# Altium PCB MB_ANALOG.PcbDoc
Units mm, origin at the board's own origin, x right, y up, seen from the top; angles counter-clockwise.
Board outline 130 x 70 mm, 2 copper layers (Top Layer, Bottom Layer); 63 components, 37 nets, 189 pads, 0 vias.
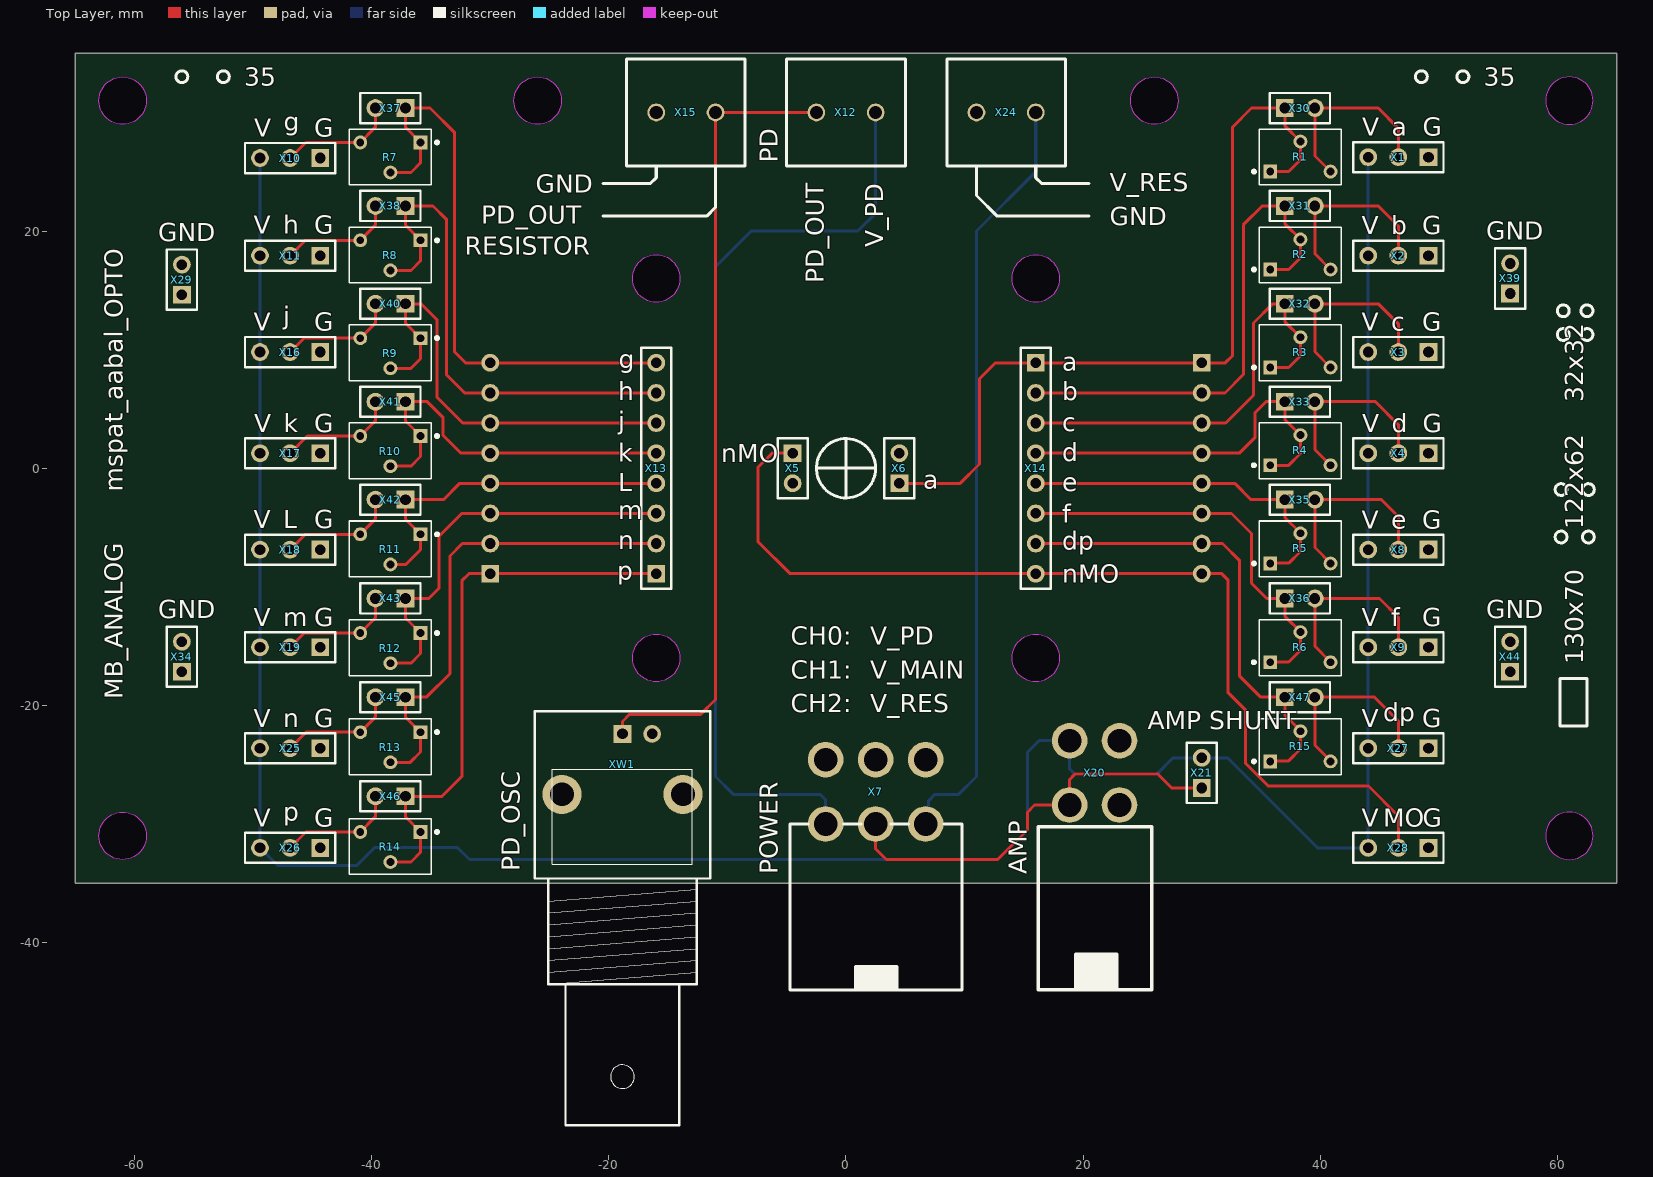
[diagram p0: Top Layer view]
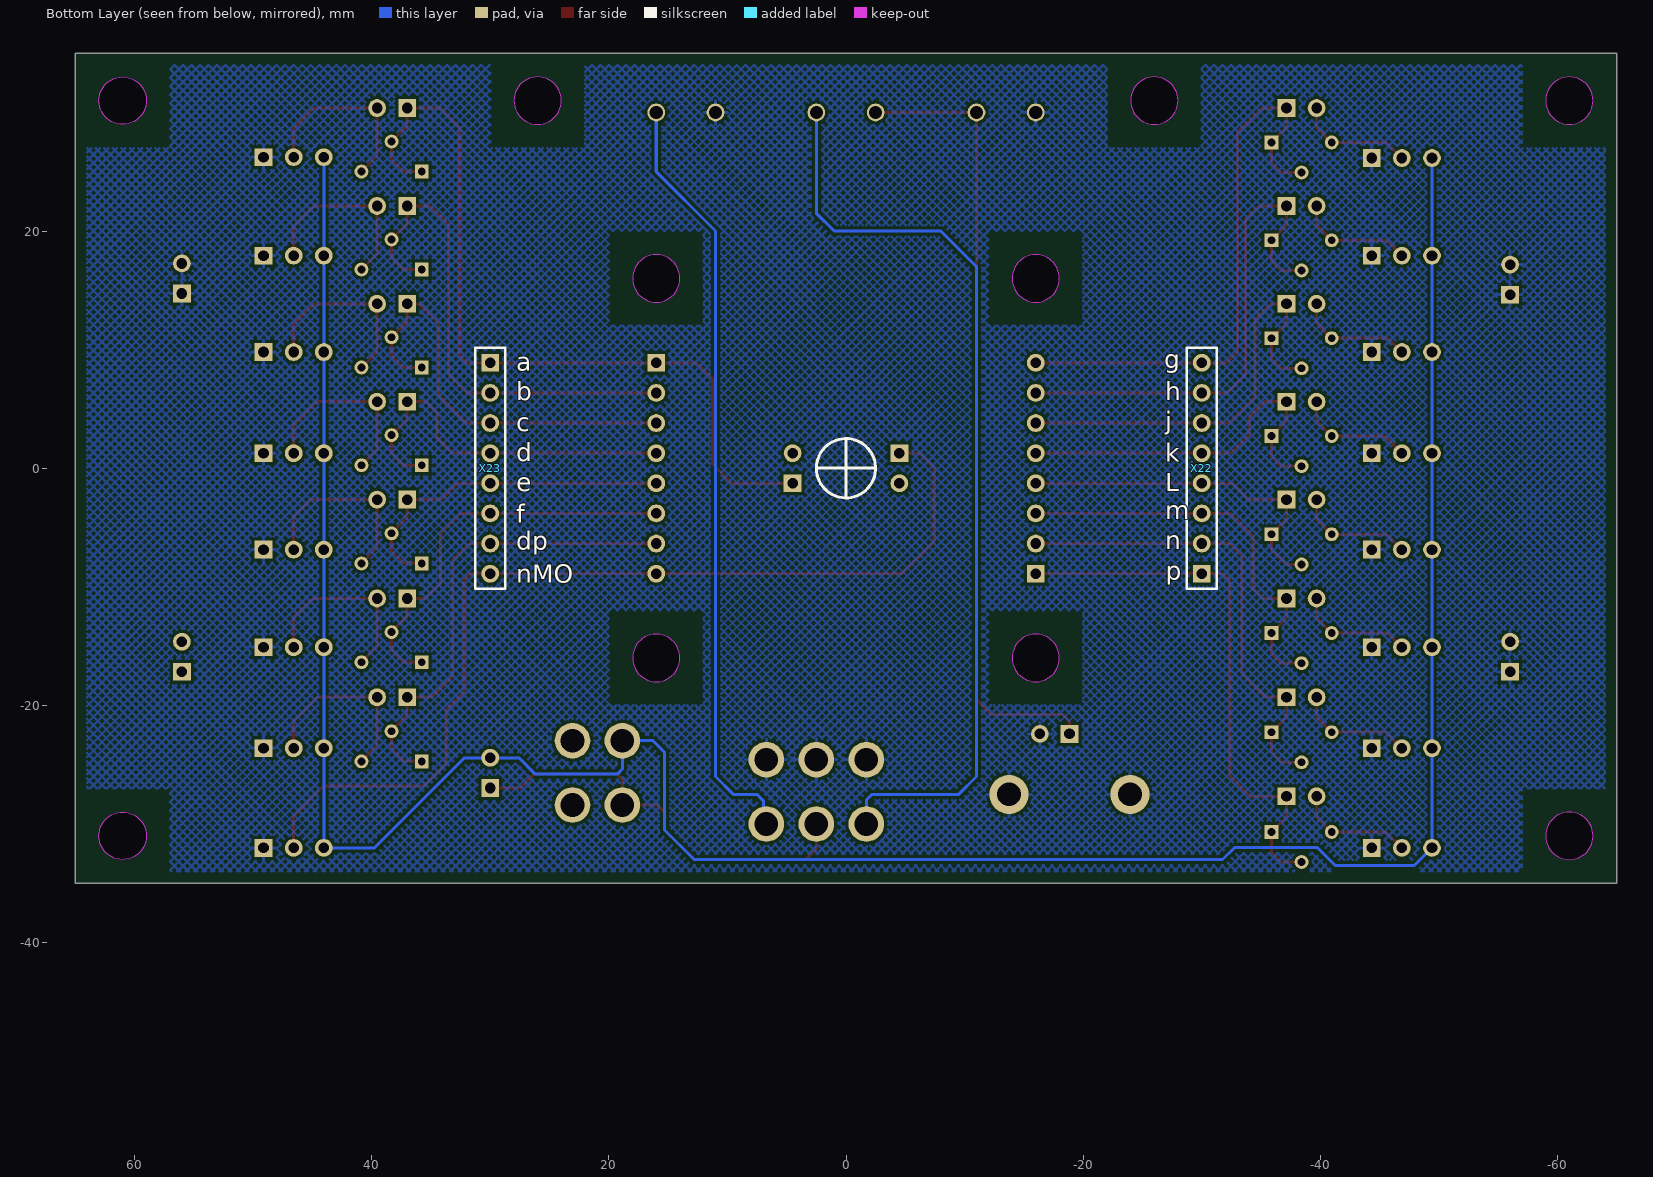
[diagram p1: Bottom Layer view, seen from below]

## Layer stack, top to bottom
Top Solder: solder mask 0.0102, Solder Resist, Dk 3.5
Top Layer: signal copper 0.0356
Dielectric 1: dielectric 0.32, FR-4, Dk 4.8
Bottom Layer: signal copper 0.0356
Bottom Solder: solder mask 0.0102, Solder Resist, Dk 3.5

## Board outline
-65,-35 65,-35 65,35 -65,35
cut-out: -16,-18 cw(c-16,-16) -18,-16 cw(c-16,-16) -16,-14 cw(c-16,-16) -14,-16 cw(c-16,-16)
cut-out: 26,29 cw(c26,31) 24,31 cw(c26,31) 26,33 cw(c26,31) 28,31 cw(c26,31)
cut-out: -16,14 cw(c-16,16) -18,16 cw(c-16,16) -16,18 cw(c-16,16) -14,16 cw(c-16,16)
cut-out: 16,-18 cw(c16,-16) 14,-16 cw(c16,-16) 16,-14 cw(c16,-16) 18,-16 cw(c16,-16)
cut-out: 16,14 cw(c16,16) 14,16 cw(c16,16) 16,18 cw(c16,16) 18,16 cw(c16,16)
cut-out: -26,29 cw(c-26,31) -28,31 cw(c-26,31) -26,33 cw(c-26,31) -24,31 cw(c-26,31)
cut-out: -61,29 cw(c-61,31) -63,31 cw(c-61,31) -61,33 cw(c-61,31) -59,31 cw(c-61,31)
cut-out: 59,31 ccw(c61,31) 61,29 ccw(c61,31) 63,31 ccw(c61,31) 61,33 ccw(c61,31)
cut-out: 59,-31 ccw(c61,-31) 61,-33 ccw(c61,-31) 63,-31 ccw(c61,-31) 61,-29 ccw(c61,-31)
cut-out: -61,-33 cw(c-61,-31) -63,-31 cw(c-61,-31) -61,-29 cw(c-61,-31) -59,-31 cw(c-61,-31)

## Design rules (kind name [scope] priority, off if disabled: settings)
Clearance [All] p1: gap=0.254 ignorepadtopadclearanceinfootprint=FALSE except(0: Arc-Hole Track-Hole SMDPad-Hole THPad-Hole Via-Hole Fill-Hole Poly-Hole Region-Hole Text-Hole)
PolygonConnect [All] p1: connectstyle=Relief reliefconductorwidth=0.254 reliefentries=4 polygonreliefangle="90 Angle" airgapwidth=0.254
RoutingVias [All] p1: holewidth=0.711 width=1.27 viastyle="Through Hole" minholewidth=0.711 minwidth=1.27 maxholewidth=0.711 maxwidth=1.27
SolderMaskExpansion [All] p1: expansion=0.102 istentingtop=FALSE
Width [All] p1: maxlimit=0.254 minlimit=0.254 preferedwidth=0.254
30 further rules are at their usual default settings.

## Classes and differential pairs
component class MB_ANALOG: R1 R2 R3 R4 R5 R6 R7 R8 R9 R10 R11 R12 R13 R14 R15 X1 X2 X3 X4 X5 X6 X7 X8 X9 X10 X11 X13 X18 X23 X25 X27 X34 X37 X46 X47 XW1

## Components (designator, comment, footprint, x,y, rotation, side; value= is the part's Value field where it differs from the comment)
R1 "RES 3266W" "RES 3266W" 35.779,25.011 r0 top
R2 "RES 3266W" "RES 3266W" 35.779,16.756 r0 top
R3 "RES 3266W" "RES 3266W" 35.779,8.501 r0 top
R4 "RES 3266W" "RES 3266W" 35.779,0.25 r0 top
R5 "RES 3266W" "RES 3266W" 35.779,-8.03 r0 top
R6 "RES 3266W" "RES 3266W" 35.779,-16.361 r0 top
R7 "RES 3266W" "RES 3266W" -35.875,27.475 r180 top
R8 "RES 3266W" "RES 3266W" -35.875,19.22 r180 top
R9 "RES 3266W" "RES 3266W" -35.875,10.965 r180 top
R10 "RES 3266W" "RES 3266W" -35.875,2.71 r180 top
R11 "RES 3266W" "RES 3266W" -35.875,-5.57 r180 top
R12 "RES 3266W" "RES 3266W" -35.875,-13.901 r180 top
R13 "RES 3266W" "RES 3266W" -35.875,-22.258 r180 top
R14 "RES 3266W" "RES 3266W" -35.875,-30.665 r180 top
R15 "RES 3266W" "RES 3266W" 35.779,-24.718 r0 top
X1 "Header 3" HDR1X3 49.114,26.231 r180 top
X2 "Header 3" HDR1X3 49.114,17.925 r180 top
X3 "Header 3" HDR1X3 49.114,9.797 r180 top
X4 "Header 3" HDR1X3 49.114,1.262 r180 top
X5 "Header 2" HDR1X2 -4.5,1.27 r270 top
X6 "Header 2" HDR1X2 4.5,-1.27 r90 top
X7 "POWER" POWER -1.717,-30 r180 top
X8 "Header 3" HDR1X3 49.114,-6.866 r180 top
X9 "Header 3" HDR1X3 49.114,-15.095 r180 top
X10 "Header 3" HDR1X3 -44.333,26.154 r180 top
X11 "Header 3" HDR1X3 -44.333,17.925 r180 top
X12 "KL_2" KLEMMNIK_2 2.5,30 r180 top
X13 "Header 8" HDR1X8 -16,-8.89 r90 top
X14 "Header 8" HDR1X8 16,8.89 r270 top
X15 "KL_2" KLEMMNIK_2 -11,30 r180 top
X16 "Header 3" HDR1X3 -44.333,9.797 r180 top
X17 "Header 3" HDR1X3 -44.333,1.262 r180 top
X18 "Header 3" HDR1X3 -44.333,-6.866 r180 top
X19 "Header 3" HDR1X3 -44.333,-15.095 r180 top
X20 "AMP_VOLTMETR" AMP_VOLTMETR 18.86,-22.977 r0 top
X21 "Header 2" HDR1X2 30,-26.959 r90 top
X22 "Header 8" HDR1X8 -30,-8.89 r90 bottom
X23 "Header 8" HDR1X8 30,8.89 r270 bottom
X24 "KL_2" KLEMMNIK_2 16,30 r180 top
X25 "Header 3" HDR1X3 -44.333,-23.604 r180 top
X26 "Header 3" HDR1X3 -44.333,-32.012 r180 top
X27 "Header 3" HDR1X3 49.114,-23.604 r180 top
X28 "Header 3" HDR1X3 49.114,-32.012 r180 top
X29 "Header 2" HDR1X2 -56,14.63 r90 top
X30 "Header 2" HDR1X2 36.998,30.371 r0 top
X31 "Header 2" HDR1X2 36.998,22.116 r0 top
X32 "Header 2" HDR1X2 36.998,13.861 r0 top
X33 "Header 2" HDR1X2 36.998,5.606 r0 top
X34 "Header 2" HDR1X2 -56,-17.17 r90 top
X35 "Header 2" HDR1X2 36.998,-2.649 r0 top
X36 "Header 2" HDR1X2 36.998,-10.98 r0 top
X37 "Header 2" HDR1X2 -37.145,30.371 r180 top
X38 "Header 2" HDR1X2 -37.145,22.116 r180 top
X39 "Header 2" HDR1X2 56,14.73 r90 top
X40 "Header 2" HDR1X2 -37.145,13.861 r180 top
X41 "Header 2" HDR1X2 -37.145,5.606 r180 top
X42 "Header 2" HDR1X2 -37.145,-2.649 r180 top
X43 "Header 2" HDR1X2 -37.145,-10.98 r180 top
X44 "Header 2" HDR1X2 56,-17.17 r90 top (schematic designator X39)
X45 "Header 2" HDR1X2 -37.145,-19.312 r180 top
X46 "Header 2" HDR1X2 -37.145,-27.668 r180 top
X47 "Header 2" HDR1X2 36.998,-19.312 r0 top
XW1 "BNC" "BNC_RA CON" -18.85,-22.4 r90 top

## Footprints (in the part's own frame and the unit in brackets; to place one, negate y for a bottom-side part, rotate by r counter-clockwise, add the part's x,y. Pads: shape width x height; smd on the part's side, far side on the other; paste and mask are expansions set on the pad)
AMP_VOLTMETR [mm]
  round 3 hole 2: 1(0,0) 2(0,-5.423) 3(4.2,-5.423) 4(4.2,0)
  silkscreen extent -2.66,-21 6.94,-7.25
"BNC_RA CON" [mm] "Connector; BNC Elbow"
  rect 1.5x1.5 hole 0.9: 1(0,0)
  round 3.3 hole 2: 2(-5.1,-5.1) 2(-5.1,5.1)
  round 1.5 hole 0.9: 2(0,-2.5)
  silkscreen extent -33,-7.4 1.9,7.4
HDR1X2 [mm] "Connector; Header; 2 Position"
  rect 1.5x1.5 hole 0.9: 1(0,0)
  round 1.5 hole 0.9: 2(2.54,0)
  silkscreen extent -1.27,-1.27 3.81,1.27
HDR1X3 [mm] "Connector; Header; 3 Position"
  rect 1.5x1.5 hole 0.9: 1(0,0)
  round 1.5 hole 0.9: 2(2.54,0) 3(5.08,0)
  silkscreen extent -1.27,-1.27 6.35,1.27
HDR1X8 [mm] "Connector; Header; 8 Position"
  rect 1.5x1.5 hole 0.9: 1(0,0)
  round 1.5 hole 0.9: 2(2.54,0) 3(5.08,0) 4(7.62,0) 5(10.16,0) 6(12.7,0) 7(15.24,0) 8(17.78,0)
  silkscreen extent -1.27,-1.27 19.05,1.27
KLEMMNIK_2 [mm]
  round 1.5 hole 1.1: 1(0,0) 2(5,0)
  silkscreen extent -2.5,-4.5 7.5,4.5
POWER [mm]
  round 3 hole 2: 1(0,0) 2(-4.217,0) 3(-8.435,0) 4(0,-5.422) 5(-4.217,-5.422) 6(-8.435,-5.422)
  silkscreen extent -11.5,0 3,14
"RES 3266W" [mm]
  rect 1.168x1.168 hole 0.66: 1(0,0)
  round 1.168 hole 0.66: 2(2.54,2.54) 3(5.08,0)
  silkscreen extent -1.48,-1.12 5.99,3.58

## Part data
X1 X2 X3 X4 X8 X9 X10 X11 X16 X17 X18 X19 X25 X26 X27 X28: "Header, 3-Pin", LatestRevisionDate=17-Jul-2002, LatestRevisionNote="Re-released for DXP Platform.", Publisher="Altium Limited"
X5 X6 X21 X29 X30 X31 X32 X33 X34 X35 X36 X37 X38 X39 X40 X41 X42 X43 X44 X45 X46 X47: "Header, 2-Pin", LatestRevisionDate=17-Jul-2002, LatestRevisionNote="Re-released for DXP Platform.", Publisher="Altium Limited"
X12 X15 X24: library part KLEMMNIK_2
X13 X14 X22 X23: "Header, 8-Pin", LatestRevisionDate=17-Jul-2002, LatestRevisionNote="Re-released for DXP Platform.", Publisher="Altium Limited"
XW1: "BNC Elbow Connector", LatestRevisionDate=17-Jul-2002, LatestRevisionNote="Re-released for DXP Platform.", Publisher="Altium Limited"

## Nets (pads, with @x,y where several pads share a name; then routed paths per layer and width w, separated by ;. In a path a pad name is that pad's centre, name@x,y a point inside that pad or via, vN(x,y) a via of type N, cw(c..) or ccw(c..) an arc to the next point about the centre after c; other vN are vias at no path point)
a: R1.3 X1.2 X30.2 | length 16.1
  Top Layer w0.254: R1.3 39.538,26.332 X30.2 44.879,30.371 46.574,28.676 X1.2
a_0: R1.1 R1.2 X6.1 X14.1 X23.1 X30.1 | length 69
  Top Layer w0.254: X6.1 9.63,-1.27 11.25,0.35 11.25,7.54 12.6,8.89 X14.1 X23.1 31.99,8.89 32.6,9.5 32.6,28.771 34.2,30.371 X30.1 36.998,28.872 R1.2 38.319,26.003 37.327,25.011 R1.1
b: R2.3 X2.2 X31.2 | length 16.1
  Top Layer w0.254: R2.3 39.538,18.077 X31.2 44.884,22.116 46.574,20.426 X2.2
b_0: R2.1 R2.2 X14.2 X23.2 X31.1 | length 42.8
  Top Layer w0.254: X14.2 X23.2 31.95,6.35 33.5,7.9 33.5,20.527 35.089,22.116 X31.1 36.998,20.617 R2.2 38.319,17.748 37.327,16.756 R2.1
c: R3.3 X3.2 X32.2 | length 16
  Top Layer w0.254: R3.3 39.538,9.822 X32.2 44.889,13.861 46.574,12.176 X3.2
c_0: R3.1 R3.2 X14.3 X23.3 X32.1 | length 36.6
  Top Layer w0.254: X14.3 X23.3 32.01,3.81 34.361,6.161 34.361,12.244 35.978,13.861 X32.1 36.998,12.362 R3.2 38.319,9.493 37.327,8.501 R3.1
d: R4.3 X4.2 X33.2 | length 16.2
  Top Layer w0.254: R4.3@40.859,0.246 39.538,1.567 X33.2 44.644,5.606 46.574,3.676 X4.2
d_0: R4.1 R4.2 X14.4 X23.4 X33.1 | length 31.9
  Top Layer w0.254: X14.4 X23.4 33.17,1.27 34.506,2.606 34.506,4.706 35.406,5.606 X33.1 36.998,4.107 38.319,2.786 38.319,1.238 37.327,0.246 R4.1@35.779,0.246
dp: R15.3 X27.2 X47.2 | length 16.1
  Top Layer w0.254: R15.3@40.859,-24.671 39.538,-23.35 X47.2 44.562,-19.312 46.574,-21.324 X27.2
dp_0: R15.1 R15.2 X14.7 X23.7 X47.1 | length 39.9
  Top Layer w0.254: X14.7 X23.7 31.75,-6.35 33.2,-7.8 33.2,-17.533 34.979,-19.312 X47.1 36.998,-20.81 38.319,-22.131 R15.2 38.319,-23.679 37.327,-24.671 R15.1@35.779,-24.671
e: R5.3 X8.2 X35.2 | length 16.3
  Top Layer w0.254: R5.3@40.859,-8.009 39.538,-6.688 X35.2 45.149,-2.649 46.574,-4.074 X8.2
e_0: R5.1 R5.2 X14.5 X23.5 X35.1 | length 29.4
  Top Layer w0.254: X14.5 X23.5 32.77,-1.27 34.15,-2.649 X35.1 36.998,-4.148 38.319,-5.469 R5.2 38.319,-7.017 37.327,-8.009 R5.1@35.779,-8.009
f: R6.3 X9.2 X36.2 | length 16.1
  Top Layer w0.254: R6.3@40.859,-16.34 39.538,-15.019 X36.2 44.98,-10.98 46.574,-12.574 X9.2
f_0: R6.1 R6.2 X14.6 X23.6 X36.1 | length 34.3
  Top Layer w0.254: X14.6 X23.6 32.51,-3.81 34.2,-5.5 34.2,-9.693 35.487,-10.98 X36.1 36.998,-12.479 38.319,-13.8 R6.2 38.319,-15.348 37.327,-16.34 R6.1@35.779,-16.34
g: R7.3 X10.2 X37.2 | length 9.9
  Top Layer w0.254: X10.2 -45.552,27.475 R7.3 -39.685,28.745 X37.2
g_0: R7.1 R7.2 X13.8 X22.8 X37.1 | length 48.9
  Top Layer w0.254: R7.2 -36.688,24.935 -35.875,25.749 R7.1 -37.145,28.745 X37.1 -35.074,30.371 -33,28.297 -33,9.8 -32.09,8.89 X22.8 X13.8
GND: X1.1 X2.1 X3.1 X4.1 X7.4 X7.5 X7.6 X8.1 X9.1 X10.1 X11.1 X15.2 X16.1 X17.1 X18.1 X19.1 X24.2 X25.1 X26.1 X27.1 X28.1 X29.1 X29.2 X34.1 X34.2 X39.1 X39.2 XW1.2
h: R8.3 X11.2 X38.2 | length 9.9
  Top Layer w0.254: X11.2 -45.577,19.22 R8.3 -39.685,20.49 X38.2
h_0: R8.1 R8.2 X13.7 X22.7 X38.1 | length 43.4
  Top Layer w0.254: R8.2 -36.688,16.68 -35.875,17.494 R8.1 -37.145,20.49 X38.1 -34.82,22.116 -33.7,20.996 -33.7,7.9 -32.15,6.35 X22.7 X13.7
j: R9.3 X16.2 X40.2 | length 9.8
  Top Layer w0.254: X16.2 -45.704,10.965 R9.3 -39.685,12.235 X40.2
j_0: R9.1 R9.2 X13.6 X22.6 X40.1 | length 37.2
  Top Layer w0.254: R9.2 -36.688,8.425 -35.875,9.239 R9.1 -37.145,12.235 X40.1 -35.836,13.861 -34.508,12.533 -34.508,6.008 -32.31,3.81 X22.6 X13.6
k: R10.3 X17.2 X41.2 | length 9.9
  Top Layer w0.254: X17.2 -45.425,2.71 R10.3 -39.685,3.98 X41.2
k_0: R10.1 R10.2 X13.5 X22.5 X41.1 | length 31.8
  Top Layer w0.254: R10.2 -36.688,0.17 -35.875,0.984 R10.1 -37.145,3.98 X41.1 -35.305,5.606 -34,4.3 -34,2.8 -32.47,1.27 X22.5 X13.5
l: R11.3 X18.2 X42.2 | length 9.9
  Top Layer w0.254: X18.2 -45.577,-5.57 R11.3 -39.685,-4.3 X42.2
l_0: R11.1 R11.2 X13.4 X22.4 X42.1 | length 29.5
  Top Layer w0.254: R11.2 -37.12,-8.11 -35.875,-6.865 R11.1 -37.145,-4.3 X42.1 -33.949,-2.649 -32.57,-1.27 X22.4 X13.4
m: R12.3 X19.2 X43.2 | length 9.9
  Top Layer w0.254: X19.2 -45.679,-13.901 R12.3 -39.685,-12.631 X43.2
M\O\: X5.1 X14.8 X23.8 X28.2 | length 84.2
  Top Layer w0.254: X5.1 -6.23,1.27 -7.43,0.07 -7.43,-6.17 -4.71,-8.89 13.75,-8.89 X14.8 X23.8 31.69,-8.89 32.2,-9.4 32.2,-18.9 33.7,-20.4 33.7,-24.9 35.6,-26.8 44.05,-26.8 46.574,-29.324 X28.2
m_0: R12.1 R12.2 X13.3 X22.3 X43.1 | length 34.7
  Top Layer w0.254: R12.2 -36.688,-16.441 -35.875,-15.628 R12.1 -37.145,-12.631 X43.1 -35.18,-10.98 -34.325,-10.125 -34.325,-5.725 -32.41,-3.81 X22.3 X13.3
n: R13.3 X25.2 X45.2 | length 9.9
  Top Layer w0.254: X25.2 -45.527,-22.258 R13.3 -39.685,-20.988 X45.2
n_0: R13.1 R13.2 X13.2 X22.2 X45.1 | length 40.4
  Top Layer w0.254: R13.2 -36.739,-24.798 -35.875,-23.933 R13.1 -37.145,-20.988 X45.1 -35.392,-19.312 -33.4,-17.319 -33.4,-7.4 -32.35,-6.35 X22.2 X13.2
p: R14.3 X26.2 X46.2 | length 10
  Top Layer w0.254: X26.2 -45.527,-30.665 R14.3 -39.685,-29.395 X46.2
p_0: R14.1 R14.2 X13.1 X22.1 X46.1 | length 46.7
  Top Layer w0.254: R14.2 -36.688,-33.205 -35.875,-32.392 R14.1 -37.145,-29.395 X46.1 -34.075,-27.668 -32.4,-25.992 -32.4,-9.5 -31.79,-8.89 X22.1 X13.1
PD_OUT: X12.2 X15.1 XW1.1 | length 67.7
  Top Layer w0.254: XW1.1 -18.85,-21.35 -18.25,-20.75 -12.25,-20.75 -11,-19.5 -11,16.6 X15.1 X12.2
V: X7.2 X20.2 X21.1 | length 35.6
  Top Layer w0.254: X7.2 2.5,-32.1 3.4,-33 12.8,-33 15.3,-30.5 15.3,-29 15.9,-28.4 X20.2 18.86,-26.24 19.3,-25.8 26.3,-25.8 27.459,-26.959 X21.1
V_0: X1.3 X2.3 X3.3 X4.3 X8.3 X9.3 X10.3 X11.3 X16.3 X17.3 X18.3 X19.3 X20.1 X21.2 X25.3 X26.3 X27.3 X28.3 | length 225.8
  Bottom Layer w0.254: X10.3 X11.3 X16.3 X17.3 X18.3 X19.3 X25.3 X26.3 -47.924,-33.5 -41.25,-33.5 -39.75,-32 -32.75,-32 -31.75,-33 12.8,-33 15.3,-30.5 15.3,-23.95 16.273,-22.977 X20.1 18.86,-25.36 19.3,-25.8 26.2,-25.8 27.582,-24.419 X21.2 32.169,-24.419 39.762,-32.012 X28.3 X27.3 X9.3 X8.3 X4.3 X3.3 X2.3 X1.3
V_PD: X7.1 X12.1 | length 79
  Bottom Layer w0.254: X7.1 -1.717,-27.983 -2.2,-27.5 -9.5,-27.5 -11,-26 -11,17 -8,20 1,20 2.5,21.5 X12.1
V_RES: X7.3 X24.1 | length 64.9
  Bottom Layer w0.254: X7.3@6.967,-30 6.967,-28.033 7.5,-27.5 9.5,-27.5 11,-26 11,20 16,25 X24.1
pads on no net: X5.2 X6.2 X20.3 X20.4 X44.1 X44.2

## Polygon pours and split planes (outlines as drawn)
GND on Bottom Layer "NONET_L-01_P-001" (hatched 45Degree grid 0.508 track 0.203, remove dead copper, pour order 0): -64,-34 -64,34 64,34 64,-34

## Other copper
Bottom Layer:
  pour cut-out: 57,35 65,35 65,27 57,27
  pour cut-out: -20,-12 -12,-12 -12,-20 -20,-20
  pour cut-out: 22,35 30,35 30,27 22,27
  pour cut-out: -20,20 -12,20 -12,12 -20,12
  pour cut-out: 12,-12 20,-12 20,-20 12,-20
  pour cut-out: 12,20 20,20 20,12 12,12
  pour cut-out: -30,35 -22,35 -22,27 -30,27
  pour cut-out: -65,-27 -57,-27 -57,-35 -65,-35
  pour cut-out: 57,-27 65,-27 65,-35 57,-35
  pour cut-out: -65,35 -57,35 -57,27 -65,27

## Silkscreen, mask and mechanical layers (free items; w line width, h text height)
Top Overlay:
  circle w0.254: c48.519,33.016 r0.5
  circle w0.254: c52.019,33.016 r0.5
  circle w0.254: c-52.5,33.016 r0.5
  circle w0.254: c-56,33.016 r0.5
  circle w0.254: c60.3,-1.8 r0.5
  circle w0.254: c60.3,-5.8 r0.5
  circle w0.254: c62.6,-1.8 r0.5
  circle w0.254: c62.6,-5.8 r0.5
  circle w0.254: c60.481,13.275 r0.5
  circle w0.254: c62.481,13.275 r0.5
  circle w0.254: c62.481,11.275 r0.5
  circle w0.254: c60.481,11.275 r0.5
  circle w0.254: c0,0 r2.5
  lines w0.254: -20.5,21.25 -11.75,21.25 -11,22 -11,25.5 ; -20.5,24 -16.5,24 -16,24.5 -16,25.5 ; -2.5,0 2.5,0 ; 0,-2.5 0,2.5 ; 11,25.5 11,23 12.75,21.25 20.5,21.25 ; 16,25.5 16,24.5 ; 20.5,24 16.5,24 16,24.5 ; 16,24.5 16,24.5 ; 16,24.5 16,24.5 ; 60.2,-21.75 60.2,-17.75 62.5,-17.75 62.5,-21.75 60.2,-21.75
  text "35" at -50.746,32.254 h1.52
  text "35" at 53.773,32.254 h1.52
  text "g" at -47.424,28.449 h1.52
  text "V" at 43.534,28.017 h1.52
  text "a" at 46.023,28.017 h1.52
  text "G" at 48.614,28.017 h1.52
  text "V" at -49.913,27.941 h1.52
  text "G" at -44.833,27.941 h1.52
  text "PD" at -5.75,25.75 h1.52 r90
  text "V_RES" at 22.25,23.365 h1.52
  text "GND" at -26.179,23.238 h1.52
  text "PD_OUT" at -30.75,20.615 h1.52
  text "GND" at 22.25,20.488 h1.52
  text "V" at -49.938,19.762 h1.52
  text "h" at -47.449,19.762 h1.52
  text "G" at -44.858,19.762 h1.52
  text "V" at 43.508,19.737 h1.52
  text "b" at 45.997,19.737 h1.52
  text "G" at 48.588,19.737 h1.52
  text "GND" at 54,19.25 h1.52
  text "GND" at -58,19.15 h1.52
  text "V_PD" at 3.135,18.628 h1.52 r90
  text "RESISTOR" at -32.147,18 h1.52
  text "PD_OUT" at -1.865,15.58 h1.52 r90
  text "j" at -47.449,12.092 h1.52
  text "V" at -49.938,11.584 h1.52
  text "G" at -44.858,11.584 h1.52
  text "V" at 43.508,11.584 h1.52
  text "c" at 45.997,11.584 h1.52
  text "G" at 48.588,11.584 h1.52
  text "g" at -19.143,8.416 h1.52
  text "a" at 18.22,8.213 h1.52
  text "b" at 18.22,5.749 h1.52
  text "h" at -19.22,5.724 h1.52
  text "j" at -19.22,3.26 h1.52
  text "c" at 18.22,3.108 h1.52
  text "V" at -49.913,3.049 h1.52
  text "k" at -47.424,3.049 h1.52
  text "G" at -44.833,3.049 h1.52
  text "V" at 43.534,3.024 h1.52
  text "d" at 46.023,3.024 h1.52
  text "G" at 48.614,3.024 h1.52
  text "d" at 18.22,0.593 h1.52
  text "k" at -19.22,0.542 h1.52
  text "nMO" at -10.5,0.5 h1.52
  text "a" at 6.5,-1.75 h1.52
  text "e" at 18.22,-1.922 h1.52
  text "L" at -19.22,-1.947 h1.52
  text "mspat_aabal_OPTO" at -61,-2 h1.52 r90
  text "m" at -19.22,-4.309 h1.52
  text "f" at 18.22,-4.614 h1.52
  text "V" at -49.938,-5.079 h1.52
  text "L" at -47.449,-5.079 h1.52
  text "G" at -44.858,-5.079 h1.52
  text "V" at 43.508,-5.104 h1.52
  text "e" at 45.997,-5.104 h1.52
  text "G" at 48.588,-5.104 h1.52
  text "n" at -19.22,-6.849 h1.52
  text "dp" at 18.22,-6.875 h1.52
  text "p" at -19.27,-9.415 h1.52
  text "nMO" at 18.22,-9.652 h1.52
  text "GND" at -58,-12.65 h1.52
  text "GND" at 53.969,-12.65 h1.52
  text "V" at -49.938,-13.334 h1.52
  text "m" at -47.449,-13.334 h1.52
  text "G" at -44.858,-13.334 h1.52
  text "V" at 43.508,-13.334 h1.52
  text "f" at 45.997,-13.334 h1.52
  text "G" at 48.588,-13.334 h1.52
  text "CH0:" at -4.65,-14.9 h1.52
  text "V_PD" at 2.05,-14.9 h1.52
  text "130x70     122x62    32x32" at 62.171,-16.546 h1.52 r90
  text "CH1:" at -4.65,-17.742 h1.52
  text "V_MAIN" at 2.05,-17.742 h1.52
  text "MB_ANALOG" at -61,-19.5 h1.52 r90
  text "CH2:" at -4.65,-20.585 h1.52
  text "V_RES" at 2.05,-20.585 h1.52
  text "dp" at 45.286,-21.335 h1.52
  text "V" at -49.938,-21.843 h1.52
  text "n" at -47.449,-21.843 h1.52
  text "G" at -44.858,-21.843 h1.52
  text "V" at 43.508,-21.843 h1.52
  text "G" at 48.588,-21.843 h1.52
  text "AMP SHUNT" at 25.429,-22 h1.52
  text "p" at -47.449,-29.717 h1.52
  text "V" at -49.938,-30.225 h1.52
  text "G" at -44.858,-30.225 h1.52
  text "V" at 43.508,-30.25 h1.52
  text "MO" at 45.312,-30.25 h1.52
  text "G" at 48.639,-30.25 h1.52
  text "PD_OSC" at -27.5,-34 h1.52 r90
  text "POWER" at -5.75,-34.255 h1.52 r90
  text "AMP" at 15.25,-34.25 h1.52 r90
Bottom Overlay:
  circle w0.254: c0,0 r2.5
  lines w0.254: -2.5,0 2.5,0 ; 0,-2.5 0,2.5
  text "g" at -26.843,8.416 h1.52
  text "a" at 27.82,8.213 h1.52
  text "b" at 27.82,5.749 h1.52
  text "h" at -26.92,5.724 h1.52
  text "j" at -26.92,3.26 h1.52
  text "c" at 27.82,3.108 h1.52
  text "d" at 27.82,0.593 h1.52
  text "k" at -26.92,0.542 h1.52
  text "e" at 27.82,-1.922 h1.52
  text "L" at -26.92,-1.947 h1.52
  text "m" at -26.92,-4.309 h1.52
  text "f" at 27.82,-4.614 h1.52
  text "n" at -26.92,-6.849 h1.52
  text "dp" at 27.82,-6.875 h1.52
  text "p" at -26.97,-9.415 h1.52
  text "nMO" at 27.82,-9.652 h1.52
Mechanical 1:
  circle w0.254: c-16,-16 r2
  circle w0.254: c26,31 r2
  circle w0.254: c-16,16 r2
  circle w0.254: c16,-16 r2
  circle w0.254: c16,16 r2
  circle w0.254: c-26,31 r2
  circle w0.254: c-61,31 r2
  circle w0.254: c-61,-31 r2
  circle w0.254: c61,-31 r2
  circle w0.254: c61,31 r2
  lines w0.254: -65,-35 65,-35 65,35 -65,35 -65,-35